# EAGLE board led_disp_print (EAGLE 7.7.0)
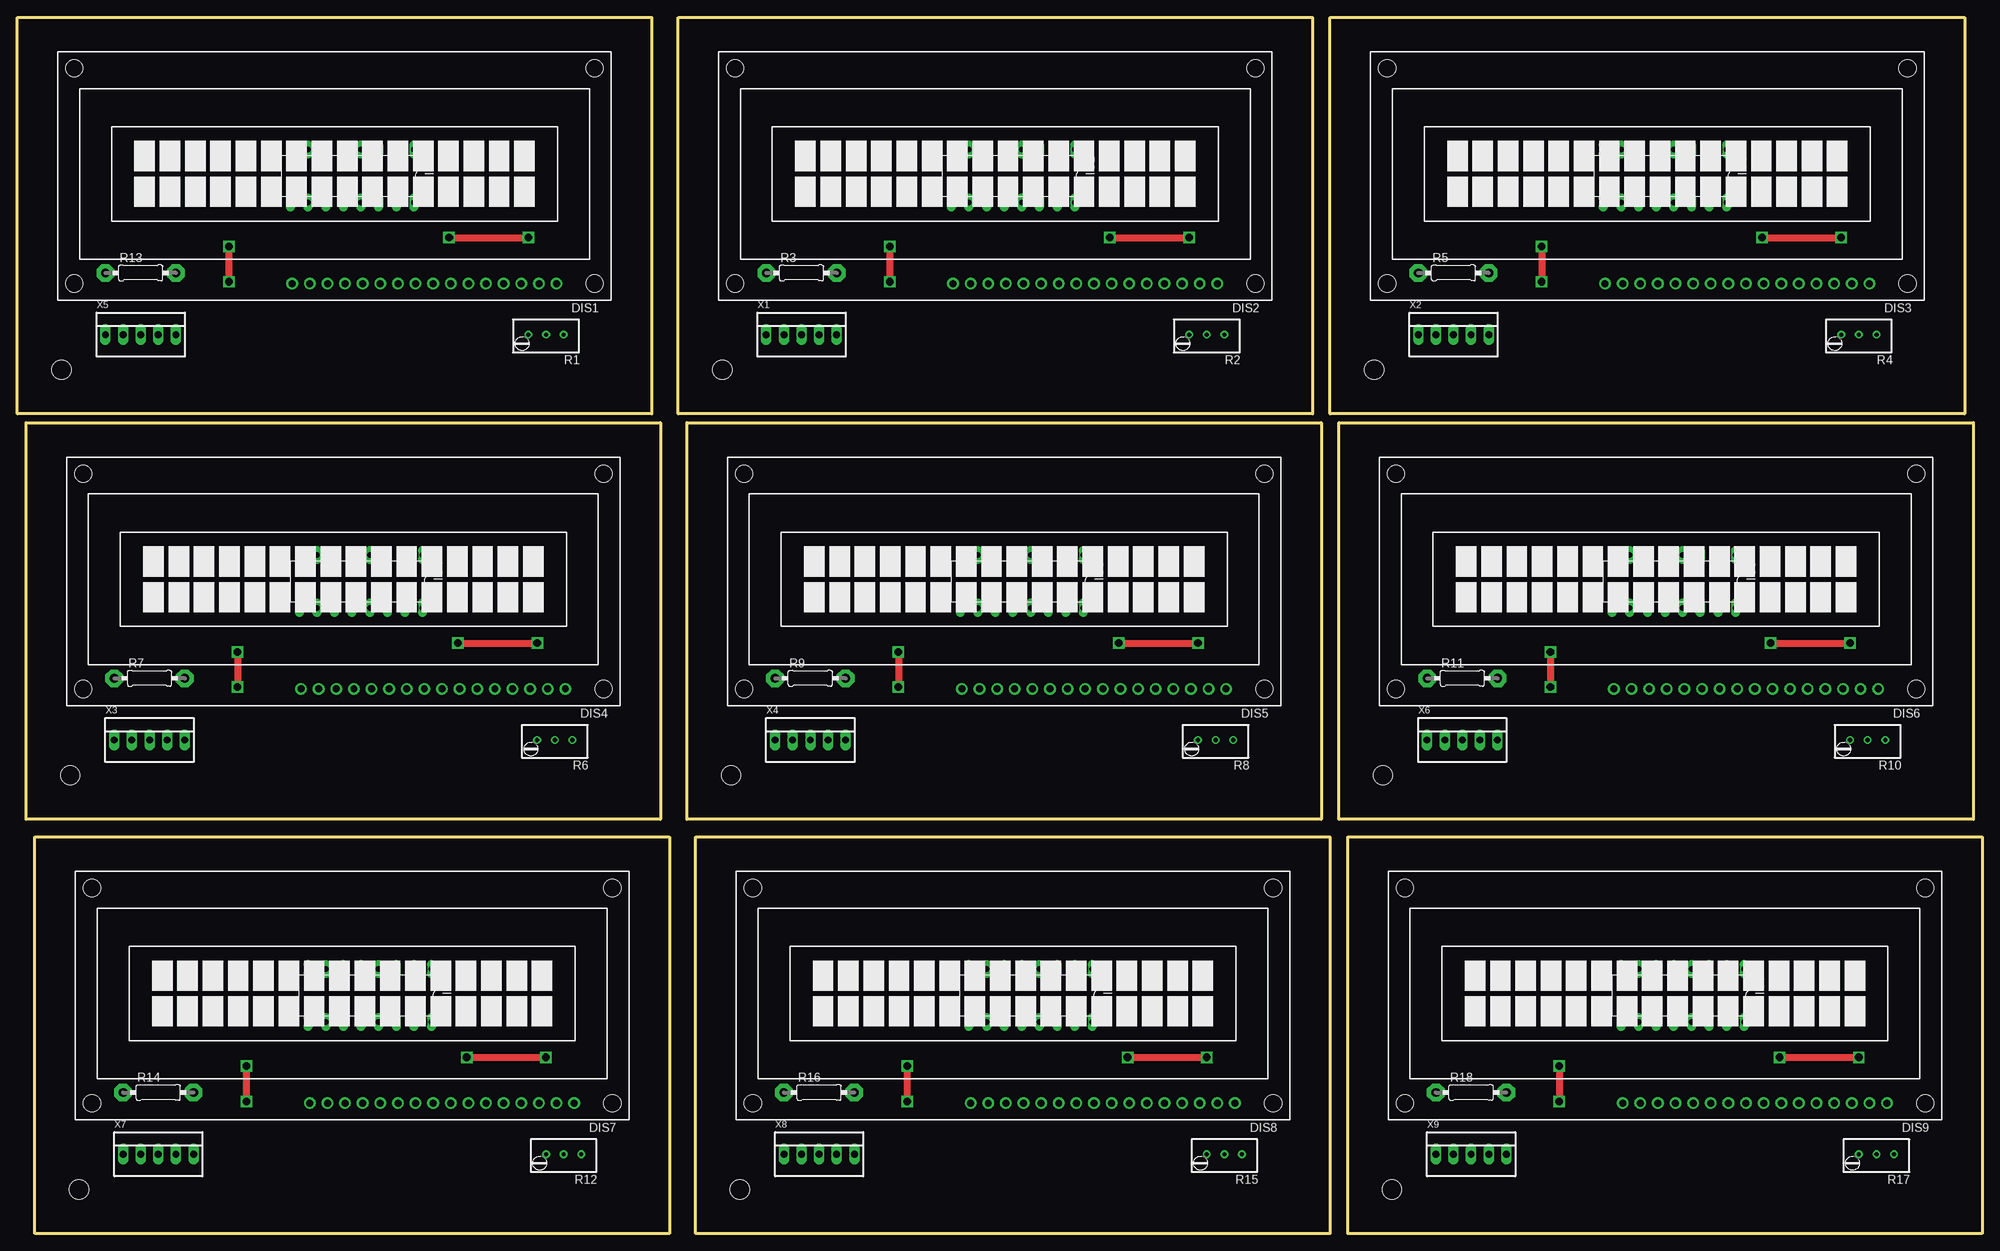
[diagram p0: board, top side]
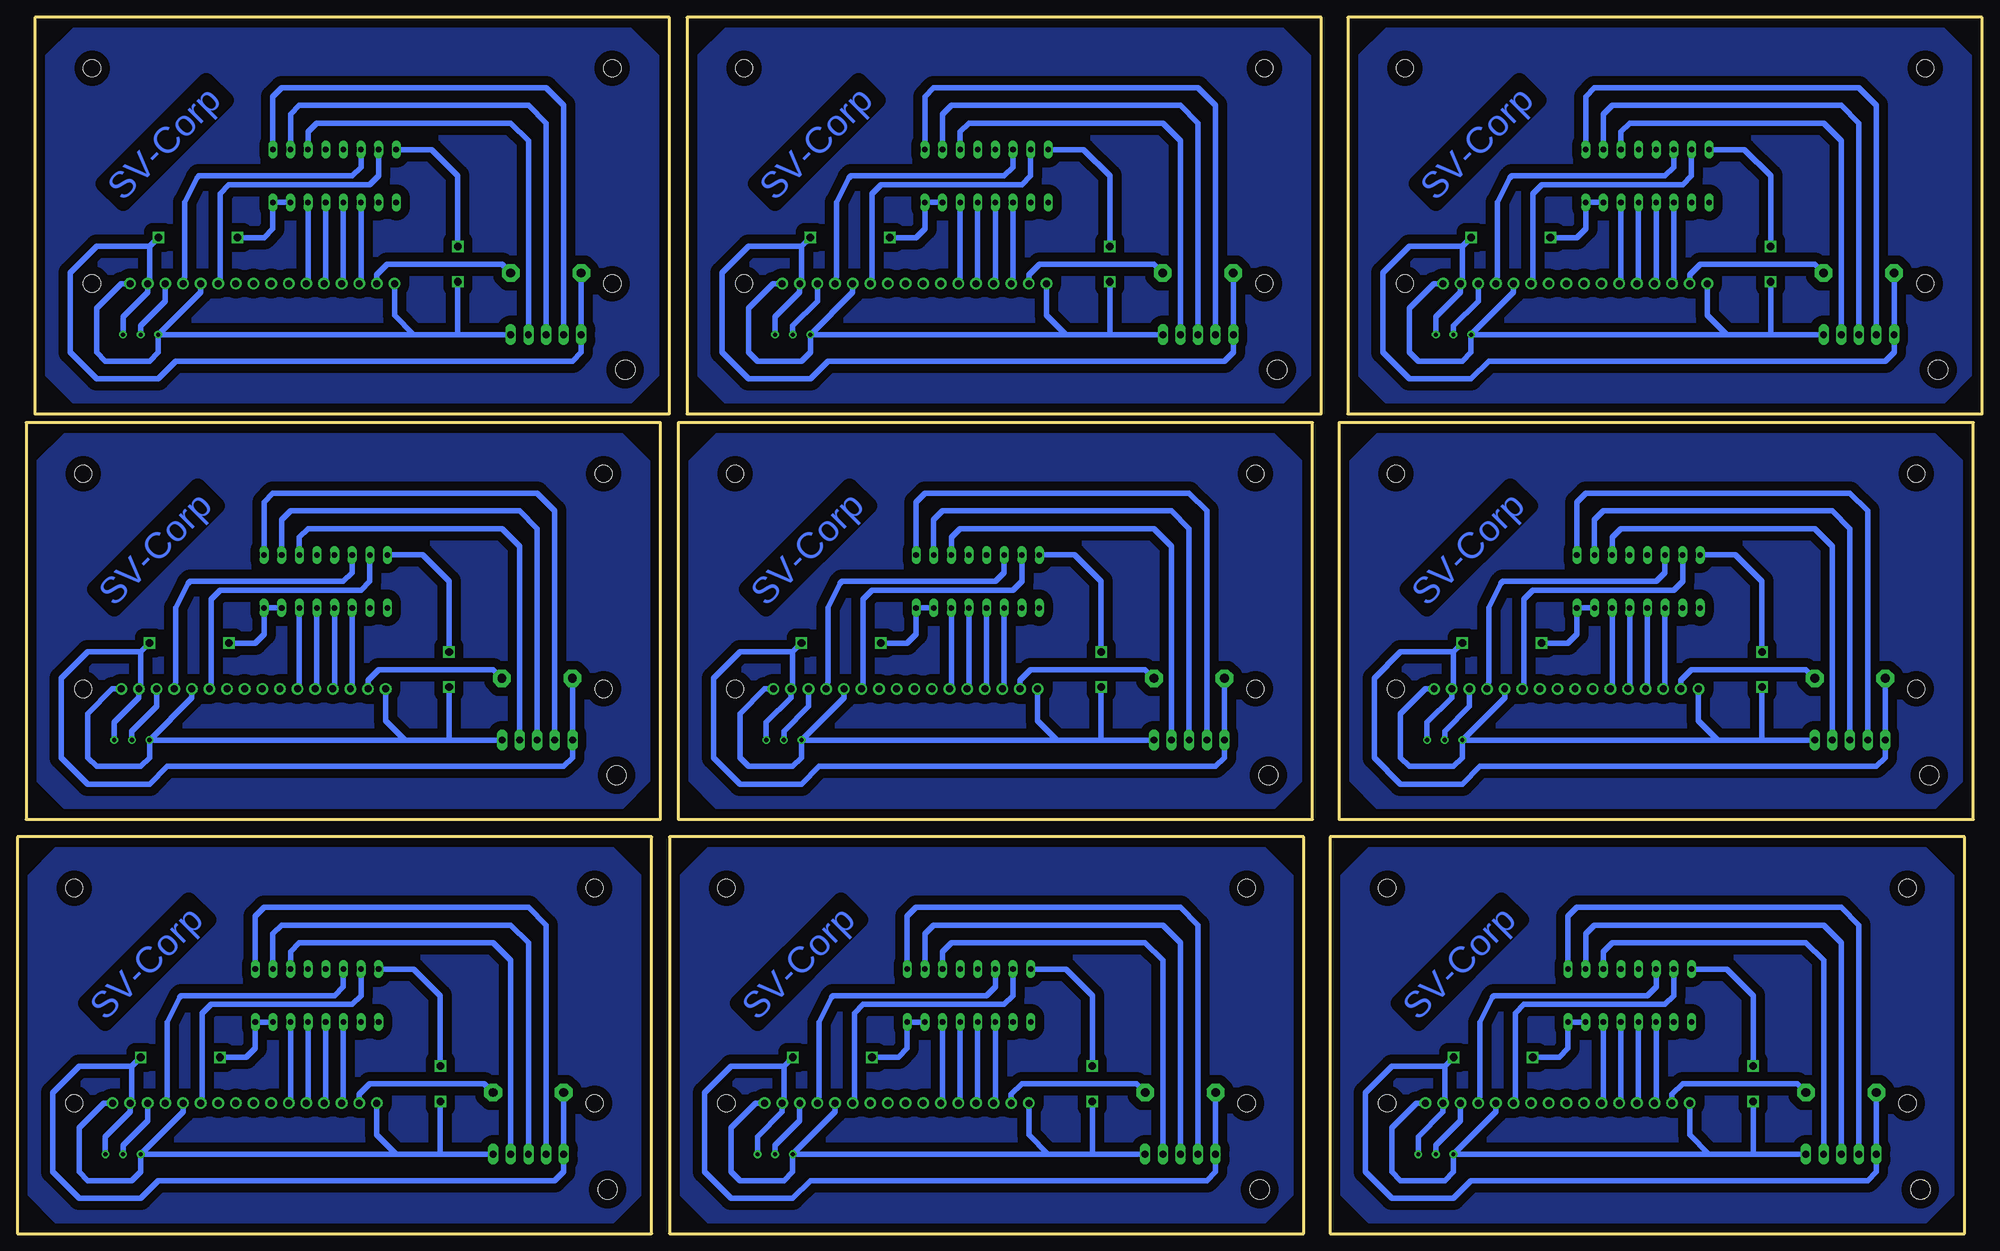
[diagram p1: board, bottom side, seen from below]

Size 283.21 x 175.26 mm. Coordinates in mm from the lower left corner, seen from the top.
Outline: 0,175.26 91.44,175.26 91.44,118.11 0,118.11 0,175.26
Outline: 95.25,175.26 186.69,175.26 186.69,118.11 95.25,118.11 95.25,175.26
Outline: 189.23,175.26 280.67,175.26 280.67,118.11 189.23,118.11 189.23,175.26
Outline: 1.27,116.84 92.71,116.84 92.71,59.69 1.27,59.69 1.27,116.84
Outline: 96.52,116.84 187.96,116.84 187.96,59.69 96.52,59.69 96.52,116.84
Outline: 190.5,116.84 281.94,116.84 281.94,59.69 190.5,59.69 190.5,116.84
Outline: 2.54,57.15 93.98,57.15 93.98,0 2.54,0 2.54,57.15
Outline: 97.79,57.15 189.23,57.15 189.23,0 97.79,0 97.79,57.15
Outline: 191.77,57.15 283.21,57.15 283.21,0 191.77,0 191.77,57.15
Copper layers (1*16): Top 0.035mm / dielectric 1.5mm / Bottom 0.035mm
Design rules "default": minimum track width 10mil, minimum drill 24mil, track to track 8mil, track to pad 8mil, pad to pad 8mil, via to via 8mil, smd to smd 8mil, copper to edge 40mil, drill to drill 8mil, minimum pad ring 10mil, minimum via ring 8mil, stop-mask expansion 4mil, vias tented up to drill 0mil, thermal gap 10mil
Holes 2.8 mm at 6.35,124.46 101.6,124.46 195.58,124.46 7.62,66.04 102.87,66.04 196.85,66.04 8.89,6.35 104.14,6.35 198.12,6.35

## Footprints (pad centres in the part's own frame; a part is rotated, then mirrored left to right if it is on the bottom)
TUXGR_16X2_R2 = drill 1 pad 1.676: 1 -32,15.5; 2 -29.46,15.5; 3 -26.92,15.5; 4 -24.38,15.5; 5 -21.84,15.5; 6 -19.3,15.5; 7 -16.76,15.5; 8 -14.22,15.5; 9 -11.68,15.5; 10 -9.14,15.5; 11 -6.6,15.5; 12 -4.06,15.5; 13 -1.52,15.5; 14 1.02,15.5; 15 3.56,15.5; 16 6.1,15.5 | hole 2.5: -37.5,-15.5; 37.5,-15.5; -37.5,15.5; 37.5,15.5
DIL16 = drill 0.813 long: 1 -8.89,-3.81; 2 -6.35,-3.81; 3 -3.81,-3.81; 4 -1.27,-3.81; 5 1.27,-3.81; 6 3.81,-3.81; 7 6.35,-3.81; 8 8.89,-3.81; 9 8.89,3.81; 10 6.35,3.81; 11 3.81,3.81; 12 1.27,3.81; 13 -1.27,3.81; 14 -3.81,3.81; 15 -6.35,3.81; 16 -8.89,3.81
RTRIMT93YA = drill 0.61: 1 0,-2.54; 2 0,0; 3 0,2.54
0207/10 = drill 1.27 pad 2.54 octagon: 1 -5.08,0; 2 5.08,0
22-23-2051 = drill 1 long: 1 -5.08,0; 2 -2.54,0; 3 0,0; 4 2.54,0; 5 5.08,0

## Placement (x,y rotation side)
DIS1  TUXGR_16X2_R2  [TUXGR_16X2_R2]  45.72,152.4 180 top
DIS2  TUXGR_16X2_R2  [TUXGR_16X2_R2]  140.97,152.4 180 top
DIS3  TUXGR_16X2_R2  [TUXGR_16X2_R2]  234.95,152.4 180 top
DIS4  TUXGR_16X2_R2  [TUXGR_16X2_R2]  46.99,93.98 180 top
DIS5  TUXGR_16X2_R2  [TUXGR_16X2_R2]  142.24,93.98 180 top
DIS6  TUXGR_16X2_R2  [TUXGR_16X2_R2]  236.22,93.98 180 top
DIS7  TUXGR_16X2_R2  [TUXGR_16X2_R2]  48.26,34.29 180 top
DIS8  TUXGR_16X2_R2  [TUXGR_16X2_R2]  143.51,34.29 180 top
DIS9  TUXGR_16X2_R2  [TUXGR_16X2_R2]  237.49,34.29 180 top
IC1  4094N  [DIL16]  48.26,152.4 180 top
IC2  4094N  [DIL16]  143.51,152.4 180 top
IC3  4094N  [DIL16]  237.49,152.4 180 top
IC4  4094N  [DIL16]  49.53,93.98 180 top
IC5  4094N  [DIL16]  144.78,93.98 180 top
IC6  4094N  [DIL16]  238.76,93.98 180 top
IC7  4094N  [DIL16]  50.8,34.29 180 top
IC8  4094N  [DIL16]  146.05,34.29 180 top
IC9  4094N  [DIL16]  240.03,34.29 180 top
R1  [RTRIMT93YA]  76.2,129.54 90 top
R2  [RTRIMT93YA]  171.45,129.54 90 top
R3  470  [0207/10]  113.03,138.43 0 top
R4  [RTRIMT93YA]  265.43,129.54 90 top
R5  470  [0207/10]  207.01,138.43 0 top
R6  [RTRIMT93YA]  77.47,71.12 90 top
R7  470  [0207/10]  19.05,80.01 0 top
R8  [RTRIMT93YA]  172.72,71.12 90 top
R9  470  [0207/10]  114.3,80.01 0 top
R10  [RTRIMT93YA]  266.7,71.12 90 top
R11  470  [0207/10]  208.28,80.01 0 top
R12  [RTRIMT93YA]  78.74,11.43 90 top
R13  470  [0207/10]  17.78,138.43 0 top
R14  470  [0207/10]  20.32,20.32 0 top
R15  [RTRIMT93YA]  173.99,11.43 90 top
R16  470  [0207/10]  115.57,20.32 0 top
R17  [RTRIMT93YA]  267.97,11.43 90 top
R18  470  [0207/10]  209.55,20.32 0 top
X1  22-23-2051  [22-23-2051]  113.03,129.54 0 top
X2  22-23-2051  [22-23-2051]  207.01,129.54 0 top
X3  22-23-2051  [22-23-2051]  19.05,71.12 0 top
X4  22-23-2051  [22-23-2051]  114.3,71.12 0 top
X5  22-23-2051  [22-23-2051]  17.78,129.54 0 top
X6  22-23-2051  [22-23-2051]  208.28,71.12 0 top
X7  22-23-2051  [22-23-2051]  20.32,11.43 0 top
X8  22-23-2051  [22-23-2051]  115.57,11.43 0 top
X9  22-23-2051  [22-23-2051]  209.55,11.43 0 top

## Library data of the parts
DIS1-DIS9 = display-lcd; OC_FARNELL: unknown; OC_NEWARK: unknown
IC1-IC9 = 40xx
R1 R2 R4 R6 R8 R10 R12 R15 R17 = rcl
R3 R5 R7 R9 R11 R13 R14 R16 R18 = resistor
X1-X9 = con-molex; MF: MOLEX; MPN: 22-23-2051; OC_FARNELL: 1462952; OC_NEWARK: 38C9178

## Nets
E: DIS1.6 IC1.7
E1: DIS2.6 IC2.7
E2: DIS3.6 IC3.7
E3: DIS4.6 IC4.7
E4: DIS5.6 IC5.7
E5: DIS6.6 IC6.7
E6: DIS7.6 IC7.7
E7: DIS8.6 IC8.7
E8: DIS9.6 IC9.7
N$1: DIS1.3 R1.2
N$2: DIS1.11 IC1.14
N$3: DIS1.12 IC1.13
N$4: DIS1.13 IC1.12
N$5: DIS1.14 IC1.11
N$6: DIS2.3 R2.2
N$7: DIS2.11 IC2.14
N$8: DIS2.12 IC2.13
N$9: DIS2.13 IC2.12
N$10: DIS2.14 IC2.11
N$11: IC2.3 X1.4
N$12: IC2.2 X1.3
N$13: IC2.1 X1.2
N$16: DIS2.15 R3.2
N$17: DIS3.3 R4.2
N$18: DIS3.11 IC3.14
N$19: DIS3.12 IC3.13
N$20: DIS3.13 IC3.12
N$21: DIS3.14 IC3.11
N$22: IC3.3 X2.4
N$23: IC3.2 X2.3
N$24: IC3.1 X2.2
N$26: DIS3.15 R5.2
N$27: DIS4.3 R6.2
N$28: DIS4.11 IC4.14
N$29: DIS4.12 IC4.13
N$30: DIS4.13 IC4.12
N$31: IC1.3 X5.4
N$32: IC1.2 X5.3
N$33: IC1.1 X5.2
N$34: DIS4.14 IC4.11
N$35: DIS1.15 R13.2
N$36: IC4.3 X3.4
N$37: IC4.2 X3.3
N$38: IC4.1 X3.2
N$40: DIS4.15 R7.2
N$41: DIS5.3 R8.2
N$42: DIS5.11 IC5.14
N$43: DIS5.12 IC5.13
N$44: DIS5.13 IC5.12
N$45: DIS5.14 IC5.11
N$46: IC5.3 X4.4
N$47: IC5.2 X4.3
N$48: IC5.1 X4.2
N$50: DIS5.15 R9.2
N$51: DIS6.3 R10.2
N$52: DIS6.11 IC6.14
N$53: DIS6.12 IC6.13
N$54: DIS6.13 IC6.12
N$55: DIS6.14 IC6.11
N$56: IC6.3 X6.4
N$57: IC6.2 X6.3
N$58: IC6.1 X6.2
N$60: DIS6.15 R11.2
N$61: DIS7.3 R12.2
N$62: DIS7.11 IC7.14
N$63: DIS7.12 IC7.13
N$64: DIS7.13 IC7.12
N$65: DIS7.14 IC7.11
N$66: IC7.3 X7.4
N$67: IC7.2 X7.3
N$68: IC7.1 X7.2
N$70: DIS7.15 R14.2
N$71: DIS8.3 R15.2
N$72: DIS8.11 IC8.14
N$73: DIS8.12 IC8.13
N$74: DIS8.13 IC8.12
N$75: DIS8.14 IC8.11
N$76: IC8.3 X8.4
N$77: IC8.2 X8.3
N$78: IC8.1 X8.2
N$80: DIS8.15 R16.2
N$81: DIS9.3 R17.2
N$82: DIS9.11 IC9.14
N$83: DIS9.12 IC9.13
N$84: DIS9.13 IC9.12
N$85: DIS9.14 IC9.11
N$86: IC9.3 X9.4
N$87: IC9.2 X9.3
N$88: IC9.1 X9.2
N$90: DIS9.15 R18.2
RS: DIS1.4 IC1.6
RS1: DIS2.4 IC2.6
RS2: DIS3.4 IC3.6
RS3: DIS4.4 IC4.6
RS4: DIS5.4 IC5.6
RS5: DIS6.4 IC6.6
RS6: DIS7.4 IC7.6
RS7: DIS8.4 IC8.6
RS8: DIS9.4 IC9.6
VDD: DIS1.2 IC1.15 IC1.16 R1.1 R13.1 X5.1
VDD1: DIS2.2 IC2.15 IC2.16 R2.1 R3.1 X1.1
VDD2: DIS3.2 IC3.15 IC3.16 R4.1 R5.1 X2.1
VDD3: DIS4.2 IC4.15 IC4.16 R6.1 R7.1 X3.1
VDD4: DIS5.2 IC5.15 IC5.16 R8.1 R9.1 X4.1
VDD5: DIS6.2 IC6.15 IC6.16 R10.1 R11.1 X6.1
VDD6: DIS7.2 IC7.15 IC7.16 R12.1 R14.1 X7.1
VDD7: DIS8.2 IC8.15 IC8.16 R15.1 R16.1 X8.1
VDD8: DIS9.2 IC9.15 IC9.16 R17.1 R18.1 X9.1
VSS: DIS1.1 DIS1.5 DIS1.16 IC1.8 R1.3 X5.5
VSS1: DIS2.1 DIS2.5 DIS2.16 IC2.8 R2.3 X1.5
VSS2: DIS3.1 DIS3.5 DIS3.16 IC3.8 R4.3 X2.5
VSS3: DIS4.1 DIS4.5 DIS4.16 IC4.8 R6.3 X3.5
VSS4: DIS5.1 DIS5.5 DIS5.16 IC5.8 R8.3 X4.5
VSS5: DIS6.1 DIS6.5 DIS6.16 IC6.8 R10.3 X6.5
VSS6: DIS7.1 DIS7.5 DIS7.16 IC7.8 R12.3 X7.5
VSS7: DIS8.1 DIS8.5 DIS8.16 IC8.8 R15.3 X8.5
VSS8: DIS9.1 DIS9.5 DIS9.16 IC9.8 R17.3 X9.5

## Tracks (layer width: path | path; a pad name or v marks a point on that pad's centre or on a via)
E
  Bottom 0.813: IC1.7 41.91,152.4 43.18,151.13 63.5,151.13 64.77,149.86 64.77,137.15 DIS1.6
E1
  Bottom 0.813: IC2.7 137.16,152.4 138.43,151.13 158.75,151.13 160.02,149.86 160.02,137.15 DIS2.6
E2
  Bottom 0.813: IC3.7 231.14,152.4 232.41,151.13 252.73,151.13 254,149.86 254,137.15 DIS3.6
E3
  Bottom 0.813: IC4.7 43.18,93.98 44.45,92.71 64.77,92.71 66.04,91.44 66.04,78.73 DIS4.6
E4
  Bottom 0.813: IC5.7 138.43,93.98 139.7,92.71 160.02,92.71 161.29,91.44 161.29,78.73 DIS5.6
E5
  Bottom 0.813: IC6.7 232.41,93.98 233.68,92.71 254,92.71 255.27,91.44 255.27,78.73 DIS6.6
E6
  Bottom 0.813: IC7.7 44.45,34.29 45.72,33.02 66.04,33.02 67.31,31.75 67.31,19.04 DIS7.6
E7
  Bottom 0.813: IC8.7 139.7,34.29 140.97,33.02 161.29,33.02 162.56,31.75 162.56,19.04 DIS8.6
E8
  Bottom 0.813: IC9.7 233.68,34.29 234.95,33.02 255.27,33.02 256.54,31.75 256.54,19.04 DIS9.6
N$1
  Bottom 0.813: DIS1.3 72.64,134.37 76.2,130.81 R1.2
N$2
  Bottom 0.813: IC1.14 52.07,137.15 DIS1.11
N$3
  Bottom 0.813: IC1.13 49.53,137.15 DIS1.12
N$4
  Bottom 0.813: IC1.12 46.99,137.15 DIS1.13
N$5
  Bottom 0.813: IC1.11 44.45,137.15 DIS1.14
N$6
  Bottom 0.813: DIS2.3 167.89,134.37 171.45,130.81 R2.2
N$7
  Bottom 0.813: IC2.14 147.32,137.15 DIS2.11
N$8
  Bottom 0.813: IC2.13 144.78,137.15 DIS2.12
N$9
  Bottom 0.813: IC2.12 142.24,137.15 DIS2.13
N$10
  Bottom 0.813: IC2.11 139.7,137.15 DIS2.14
N$11
  Bottom 0.813: IC2.3 147.32,158.75 146.05,160.02 118.11,160.02 115.57,157.48 X1.4
N$12
  Bottom 0.813: IC2.2 149.86,161.29 148.59,162.56 115.57,162.56 113.03,160.02 X1.3
N$13
  Bottom 0.813: IC2.1 152.4,163.83 151.13,165.1 113.03,165.1 110.49,162.56 X1.2
N$14
  pour Bottom (isolate 1.27): 6.35,173.99 85.09,173.99 90.17,168.91 90.17,124.46 85.09,119.38 6.35,119.38 1.27,124.46 1.27,168.91
N$15
  pour Bottom (isolate 1.27): 101.6,173.99 180.34,173.99 185.42,168.91 185.42,124.46 180.34,119.38 101.6,119.38 96.52,124.46 96.52,168.91
N$16
  Bottom 0.813: DIS2.15 137.41,138.18 135.89,139.7 119.38,139.7 R3.2
N$17
  Bottom 0.813: DIS3.3 261.87,134.37 265.43,130.81 R4.2
N$18
  Bottom 0.813: IC3.14 241.3,137.15 DIS3.11
N$19
  Bottom 0.813: IC3.13 238.76,137.15 DIS3.12
N$20
  Bottom 0.813: IC3.12 236.22,137.15 DIS3.13
N$21
  Bottom 0.813: IC3.11 233.68,137.15 DIS3.14
N$22
  Bottom 0.813: IC3.3 241.3,158.75 240.03,160.02 212.09,160.02 209.55,157.48 X2.4
N$23
  Bottom 0.813: IC3.2 243.84,161.29 242.57,162.56 209.55,162.56 207.01,160.02 X2.3
N$24
  Bottom 0.813: IC3.1 246.38,163.83 245.11,165.1 207.01,165.1 204.47,162.56 X2.2
N$25
  pour Bottom (isolate 1.27): 195.58,173.99 274.32,173.99 279.4,168.91 279.4,124.46 274.32,119.38 195.58,119.38 190.5,124.46 190.5,168.91
N$26
  Bottom 0.813: DIS3.15 231.39,138.18 229.87,139.7 213.36,139.7 R5.2
N$27
  Bottom 0.813: DIS4.3 73.91,75.95 77.47,72.39 R6.2
N$28
  Bottom 0.813: IC4.14 53.34,78.73 DIS4.11
N$29
  Bottom 0.813: IC4.13 50.8,78.73 DIS4.12
N$30
  Bottom 0.813: IC4.12 48.26,78.73 DIS4.13
N$31
  Bottom 0.813: IC1.3 52.07,158.75 50.8,160.02 22.86,160.02 20.32,157.48 X5.4
N$32
  Bottom 0.813: IC1.2 54.61,161.29 53.34,162.56 20.32,162.56 17.78,160.02 X5.3
N$33
  Bottom 0.813: IC1.1 57.15,163.83 55.88,165.1 17.78,165.1 15.24,162.56 X5.2
N$34
  Bottom 0.813: IC4.11 45.72,78.73 DIS4.14
N$35
  Bottom 0.813: DIS1.15 42.16,138.18 40.64,139.7 24.13,139.7 R13.2
N$36
  Bottom 0.813: IC4.3 53.34,100.33 52.07,101.6 24.13,101.6 21.59,99.06 X3.4
N$37
  Bottom 0.813: IC4.2 55.88,102.87 54.61,104.14 21.59,104.14 19.05,101.6 X3.3
N$38
  Bottom 0.813: IC4.1 58.42,105.41 57.15,106.68 19.05,106.68 16.51,104.14 X3.2
N$39
  pour Bottom (isolate 1.27): 7.62,115.57 86.36,115.57 91.44,110.49 91.44,66.04 86.36,60.96 7.62,60.96 2.54,66.04 2.54,110.49
N$40
  Bottom 0.813: DIS4.15 43.43,79.76 41.91,81.28 25.4,81.28 R7.2
N$41
  Bottom 0.813: DIS5.3 169.16,75.95 172.72,72.39 R8.2
N$42
  Bottom 0.813: IC5.14 148.59,78.73 DIS5.11
N$43
  Bottom 0.813: IC5.13 146.05,78.73 DIS5.12
N$44
  Bottom 0.813: IC5.12 143.51,78.73 DIS5.13
N$45
  Bottom 0.813: IC5.11 140.97,78.73 DIS5.14
N$46
  Bottom 0.813: IC5.3 148.59,100.33 147.32,101.6 119.38,101.6 116.84,99.06 X4.4
N$47
  Bottom 0.813: IC5.2 151.13,102.87 149.86,104.14 116.84,104.14 114.3,101.6 X4.3
N$48
  Bottom 0.813: IC5.1 153.67,105.41 152.4,106.68 114.3,106.68 111.76,104.14 X4.2
N$49
  pour Bottom (isolate 1.27): 102.87,115.57 181.61,115.57 186.69,110.49 186.69,66.04 181.61,60.96 102.87,60.96 97.79,66.04 97.79,110.49
N$50
  Bottom 0.813: DIS5.15 138.68,79.76 137.16,81.28 120.65,81.28 R9.2
N$51
  Bottom 0.813: DIS6.3 263.14,75.95 266.7,72.39 R10.2
N$52
  Bottom 0.813: IC6.14 242.57,78.73 DIS6.11
N$53
  Bottom 0.813: IC6.13 240.03,78.73 DIS6.12
N$54
  Bottom 0.813: IC6.12 237.49,78.73 DIS6.13
N$55
  Bottom 0.813: IC6.11 234.95,78.73 DIS6.14
N$56
  Bottom 0.813: IC6.3 242.57,100.33 241.3,101.6 213.36,101.6 210.82,99.06 X6.4
N$57
  Bottom 0.813: IC6.2 245.11,102.87 243.84,104.14 210.82,104.14 208.28,101.6 X6.3
N$58
  Bottom 0.813: IC6.1 247.65,105.41 246.38,106.68 208.28,106.68 205.74,104.14 X6.2
N$59
  pour Bottom (isolate 1.27): 196.85,115.57 275.59,115.57 280.67,110.49 280.67,66.04 275.59,60.96 196.85,60.96 191.77,66.04 191.77,110.49
N$60
  Bottom 0.813: DIS6.15 232.66,79.76 231.14,81.28 214.63,81.28 R11.2
N$61
  Bottom 0.813: DIS7.3 75.18,16.26 78.74,12.7 R12.2
N$62
  Bottom 0.813: IC7.14 54.61,19.04 DIS7.11
N$63
  Bottom 0.813: IC7.13 52.07,19.04 DIS7.12
N$64
  Bottom 0.813: IC7.12 49.53,19.04 DIS7.13
N$65
  Bottom 0.813: IC7.11 46.99,19.04 DIS7.14
N$66
  Bottom 0.813: IC7.3 54.61,40.64 53.34,41.91 25.4,41.91 22.86,39.37 X7.4
N$67
  Bottom 0.813: IC7.2 57.15,43.18 55.88,44.45 22.86,44.45 20.32,41.91 X7.3
N$68
  Bottom 0.813: IC7.1 59.69,45.72 58.42,46.99 20.32,46.99 17.78,44.45 X7.2
N$69
  pour Bottom (isolate 1.27): 8.89,55.88 87.63,55.88 92.71,50.8 92.71,6.35 87.63,1.27 8.89,1.27 3.81,6.35 3.81,50.8
N$70
  Bottom 0.813: DIS7.15 44.7,20.07 43.18,21.59 26.67,21.59 R14.2
N$71
  Bottom 0.813: DIS8.3 170.43,16.26 173.99,12.7 R15.2
N$72
  Bottom 0.813: IC8.14 149.86,19.04 DIS8.11
N$73
  Bottom 0.813: IC8.13 147.32,19.04 DIS8.12
N$74
  Bottom 0.813: IC8.12 144.78,19.04 DIS8.13
N$75
  Bottom 0.813: IC8.11 142.24,19.04 DIS8.14
N$76
  Bottom 0.813: IC8.3 149.86,40.64 148.59,41.91 120.65,41.91 118.11,39.37 X8.4
N$77
  Bottom 0.813: IC8.2 152.4,43.18 151.13,44.45 118.11,44.45 115.57,41.91 X8.3
N$78
  Bottom 0.813: IC8.1 154.94,45.72 153.67,46.99 115.57,46.99 113.03,44.45 X8.2
N$79
  pour Bottom (isolate 1.27): 104.14,55.88 182.88,55.88 187.96,50.8 187.96,6.35 182.88,1.27 104.14,1.27 99.06,6.35 99.06,50.8
N$80
  Bottom 0.813: DIS8.15 139.95,20.07 138.43,21.59 121.92,21.59 R16.2
N$81
  Bottom 0.813: DIS9.3 264.41,16.26 267.97,12.7 R17.2
N$82
  Bottom 0.813: IC9.14 243.84,19.04 DIS9.11
N$83
  Bottom 0.813: IC9.13 241.3,19.04 DIS9.12
N$84
  Bottom 0.813: IC9.12 238.76,19.04 DIS9.13
N$85
  Bottom 0.813: IC9.11 236.22,19.04 DIS9.14
N$86
  Bottom 0.813: IC9.3 243.84,40.64 242.57,41.91 214.63,41.91 212.09,39.37 X9.4
N$87
  Bottom 0.813: IC9.2 246.38,43.18 245.11,44.45 212.09,44.45 209.55,41.91 X9.3
N$88
  Bottom 0.813: IC9.1 248.92,45.72 247.65,46.99 209.55,46.99 207.01,44.45 X9.2
N$89
  pour Bottom (isolate 1.27): 198.12,55.88 276.86,55.88 281.94,50.8 281.94,6.35 276.86,1.27 198.12,1.27 193.04,6.35 193.04,50.8
N$90
  Bottom 0.813: DIS9.15 233.93,20.07 232.41,21.59 215.9,21.59 R18.2
RS
  Bottom 0.813: IC1.6 44.45,153.67 45.72,152.4 67.82,152.4 68.07,152.15 69.85,148.59 69.85,137.92 DIS1.4
RS1
  Bottom 0.813: IC2.6 139.7,153.67 140.97,152.4 163.07,152.4 163.32,152.15 165.1,148.59 165.1,137.92 DIS2.4
RS2
  Bottom 0.813: IC3.6 233.68,153.67 234.95,152.4 257.05,152.4 257.3,152.15 259.08,148.59 259.08,137.92 DIS3.4
RS3
  Bottom 0.813: IC4.6 45.72,95.25 46.99,93.98 69.09,93.98 69.34,93.73 71.12,90.17 71.12,79.5 DIS4.4
RS4
  Bottom 0.813: IC5.6 140.97,95.25 142.24,93.98 164.34,93.98 164.59,93.73 166.37,90.17 166.37,79.5 DIS5.4
RS5
  Bottom 0.813: IC6.6 234.95,95.25 236.22,93.98 258.32,93.98 258.57,93.73 260.35,90.17 260.35,79.5 DIS6.4
RS6
  Bottom 0.813: IC7.6 46.99,35.56 48.26,34.29 70.36,34.29 70.61,34.04 72.39,30.48 72.39,19.81 DIS7.4
RS7
  Bottom 0.813: IC8.6 142.24,35.56 143.51,34.29 165.61,34.29 165.86,34.04 167.64,30.48 167.64,19.81 DIS8.4
RS8
  Bottom 0.813: IC9.6 236.22,35.56 237.49,34.29 259.59,34.29 259.84,34.04 261.62,30.48 261.62,19.81 DIS9.4
VDD  (via drill 1.1)
  Top 1.016: v62.23,143.51 v73.66,143.51
  Bottom 0.813: IC1.15 IC1.16 57.15,144.78 58.42,143.51 v62.23,143.51 | R1.1 78.74,132.08 75.18,135.64 DIS1.2 74.93,137.15 74.93,142.24 | 74.93,142.24 v73.66,143.51 | 74.93,142.24 82.55,142.24 86.36,138.43 86.36,127 82.55,123.19 73.66,123.19 71.12,125.73 13.97,125.73 12.7,127 X5.1 R13.1
VDD1  (via drill 1.1)
  Top 1.016: v157.48,143.51 v168.91,143.51
  Bottom 0.813: IC2.15 IC2.16 152.4,144.78 153.67,143.51 v157.48,143.51 | R2.1 173.99,132.08 170.43,135.64 DIS2.2 170.18,137.15 170.18,142.24 | 170.18,142.24 v168.91,143.51 | 170.18,142.24 177.8,142.24 181.61,138.43 181.61,127 177.8,123.19 168.91,123.19 166.37,125.73 109.22,125.73 107.95,127 X1.1 R3.1
VDD2  (via drill 1.1)
  Top 1.016: v251.46,143.51 v262.89,143.51
  Bottom 0.813: IC3.15 IC3.16 246.38,144.78 247.65,143.51 v251.46,143.51 | R4.1 267.97,132.08 264.41,135.64 DIS3.2 264.16,137.15 264.16,142.24 | 264.16,142.24 v262.89,143.51 | 264.16,142.24 271.78,142.24 275.59,138.43 275.59,127 271.78,123.19 262.89,123.19 260.35,125.73 203.2,125.73 201.93,127 X2.1 R5.1
VDD3  (via drill 1.1)
  Top 1.016: v63.5,85.09 v74.93,85.09
  Bottom 0.813: IC4.15 IC4.16 58.42,86.36 59.69,85.09 v63.5,85.09 | R6.1 80.01,73.66 76.45,77.22 DIS4.2 76.2,78.73 76.2,83.82 | 76.2,83.82 v74.93,85.09 | 76.2,83.82 83.82,83.82 87.63,80.01 87.63,68.58 83.82,64.77 74.93,64.77 72.39,67.31 15.24,67.31 13.97,68.58 X3.1 R7.1
VDD4  (via drill 1.1)
  Top 1.016: v158.75,85.09 v170.18,85.09
  Bottom 0.813: IC5.15 IC5.16 153.67,86.36 154.94,85.09 v158.75,85.09 | R8.1 175.26,73.66 171.7,77.22 DIS5.2 171.45,78.73 171.45,83.82 | 171.45,83.82 v170.18,85.09 | 171.45,83.82 179.07,83.82 182.88,80.01 182.88,68.58 179.07,64.77 170.18,64.77 167.64,67.31 110.49,67.31 109.22,68.58 X4.1 R9.1
VDD5  (via drill 1.1)
  Top 1.016: v252.73,85.09 v264.16,85.09
  Bottom 0.813: IC6.15 IC6.16 247.65,86.36 248.92,85.09 v252.73,85.09 | R10.1 269.24,73.66 265.68,77.22 DIS6.2 265.43,78.73 265.43,83.82 | 265.43,83.82 v264.16,85.09 | 265.43,83.82 273.05,83.82 276.86,80.01 276.86,68.58 273.05,64.77 264.16,64.77 261.62,67.31 204.47,67.31 203.2,68.58 X6.1 R11.1
VDD6  (via drill 1.1)
  Top 1.016: v64.77,25.4 v76.2,25.4
  Bottom 0.813: IC7.15 IC7.16 59.69,26.67 60.96,25.4 v64.77,25.4 | R12.1 81.28,13.97 77.72,17.53 DIS7.2 77.47,19.04 77.47,24.13 | 77.47,24.13 v76.2,25.4 | 77.47,24.13 85.09,24.13 88.9,20.32 88.9,8.89 85.09,5.08 76.2,5.08 73.66,7.62 16.51,7.62 15.24,8.89 X7.1 R14.1
VDD7  (via drill 1.1)
  Top 1.016: v160.02,25.4 v171.45,25.4
  Bottom 0.813: IC8.15 IC8.16 154.94,26.67 156.21,25.4 v160.02,25.4 | R15.1 176.53,13.97 172.97,17.53 DIS8.2 172.72,19.04 172.72,24.13 | 172.72,24.13 v171.45,25.4 | 172.72,24.13 180.34,24.13 184.15,20.32 184.15,8.89 180.34,5.08 171.45,5.08 168.91,7.62 111.76,7.62 110.49,8.89 X8.1 R16.1
VDD8  (via drill 1.1)
  Top 1.016: v254,25.4 v265.43,25.4
  Bottom 0.813: IC9.15 IC9.16 248.92,26.67 250.19,25.4 v254,25.4 | R17.1 270.51,13.97 266.95,17.53 DIS9.2 266.7,19.04 266.7,24.13 | 266.7,24.13 v265.43,25.4 | 266.7,24.13 274.32,24.13 278.13,20.32 278.13,8.89 274.32,5.08 265.43,5.08 262.89,7.62 205.74,7.62 204.47,8.89 X9.1 R18.1
VSS  (via drill 1.1)
  Top 1.016: v30.48,142.24 v30.48,137.16
  Bottom 0.813: IC1.8 34.29,156.21 30.48,152.4 v30.48,142.24 | DIS1.1 79,136.9 82.55,133.35 82.55,127 81.28,125.73 74.93,125.73 73.66,127 R1.3 | DIS1.5 67.56,135.64 R1.3 | X5.5 30.48,129.54 | 30.48,129.54 36.83,129.54 | 36.83,129.54 R1.3 | DIS1.16 39.62,132.33 36.83,129.54 | 30.48,129.54 v30.48,137.16
VSS1  (via drill 1.1)
  Top 1.016: v125.73,142.24 v125.73,137.16
  Bottom 0.813: IC2.8 129.54,156.21 125.73,152.4 v125.73,142.24 | DIS2.1 174.25,136.9 177.8,133.35 177.8,127 176.53,125.73 170.18,125.73 168.91,127 R2.3 | DIS2.5 162.81,135.64 R2.3 | X1.5 125.73,129.54 | 125.73,129.54 132.08,129.54 | 132.08,129.54 R2.3 | DIS2.16 134.87,132.33 132.08,129.54 | 125.73,129.54 v125.73,137.16
VSS2  (via drill 1.1)
  Top 1.016: v219.71,142.24 v219.71,137.16
  Bottom 0.813: IC3.8 223.52,156.21 219.71,152.4 v219.71,142.24 | DIS3.1 268.23,136.9 271.78,133.35 271.78,127 270.51,125.73 264.16,125.73 262.89,127 R4.3 | DIS3.5 256.79,135.64 R4.3 | X2.5 219.71,129.54 | 219.71,129.54 226.06,129.54 | 226.06,129.54 R4.3 | DIS3.16 228.85,132.33 226.06,129.54 | 219.71,129.54 v219.71,137.16
VSS3  (via drill 1.1)
  Top 1.016: v31.75,83.82 v31.75,78.74
  Bottom 0.813: IC4.8 35.56,97.79 31.75,93.98 v31.75,83.82 | DIS4.1 80.27,78.48 83.82,74.93 83.82,68.58 82.55,67.31 76.2,67.31 74.93,68.58 R6.3 | DIS4.5 68.83,77.22 R6.3 | X3.5 31.75,71.12 | 31.75,71.12 38.1,71.12 | 38.1,71.12 R6.3 | DIS4.16 40.89,73.91 38.1,71.12 | 31.75,71.12 v31.75,78.74
VSS4  (via drill 1.1)
  Top 1.016: v127,83.82 v127,78.74
  Bottom 0.813: IC5.8 130.81,97.79 127,93.98 v127,83.82 | DIS5.1 175.52,78.48 179.07,74.93 179.07,68.58 177.8,67.31 171.45,67.31 170.18,68.58 R8.3 | DIS5.5 164.08,77.22 R8.3 | X4.5 127,71.12 | 127,71.12 133.35,71.12 | 133.35,71.12 R8.3 | DIS5.16 136.14,73.91 133.35,71.12 | 127,71.12 v127,78.74
VSS5  (via drill 1.1)
  Top 1.016: v220.98,83.82 v220.98,78.74
  Bottom 0.813: IC6.8 224.79,97.79 220.98,93.98 v220.98,83.82 | DIS6.1 269.5,78.48 273.05,74.93 273.05,68.58 271.78,67.31 265.43,67.31 264.16,68.58 R10.3 | DIS6.5 258.06,77.22 R10.3 | X6.5 220.98,71.12 | 220.98,71.12 227.33,71.12 | 227.33,71.12 R10.3 | DIS6.16 230.12,73.91 227.33,71.12 | 220.98,71.12 v220.98,78.74
VSS6  (via drill 1.1)
  Top 1.016: v33.02,24.13 v33.02,19.05
  Bottom 0.813: IC7.8 36.83,38.1 33.02,34.29 v33.02,24.13 | DIS7.1 81.54,18.79 85.09,15.24 85.09,8.89 83.82,7.62 77.47,7.62 76.2,8.89 R12.3 | DIS7.5 70.1,17.53 R12.3 | X7.5 33.02,11.43 | 33.02,11.43 39.37,11.43 | 39.37,11.43 R12.3 | DIS7.16 42.16,14.22 39.37,11.43 | 33.02,11.43 v33.02,19.05
VSS7  (via drill 1.1)
  Top 1.016: v128.27,24.13 v128.27,19.05
  Bottom 0.813: IC8.8 132.08,38.1 128.27,34.29 v128.27,24.13 | DIS8.1 176.79,18.79 180.34,15.24 180.34,8.89 179.07,7.62 172.72,7.62 171.45,8.89 R15.3 | DIS8.5 165.35,17.53 R15.3 | X8.5 128.27,11.43 | 128.27,11.43 134.62,11.43 | 134.62,11.43 R15.3 | DIS8.16 137.41,14.22 134.62,11.43 | 128.27,11.43 v128.27,19.05
VSS8  (via drill 1.1)
  Top 1.016: v222.25,24.13 v222.25,19.05
  Bottom 0.813: IC9.8 226.06,38.1 222.25,34.29 v222.25,24.13 | DIS9.1 270.77,18.79 274.32,15.24 274.32,8.89 273.05,7.62 266.7,7.62 265.43,8.89 R17.3 | DIS9.5 259.33,17.53 R17.3 | X9.5 222.25,11.43 | 222.25,11.43 228.6,11.43 | 228.6,11.43 R17.3 | DIS9.16 231.39,14.22 228.6,11.43 | 222.25,11.43 v222.25,19.05

## Text on the board
Bottom: SV-Corp | SV-Corp | SV-Corp | SV-Corp | SV-Corp | SV-Corp | SV-Corp | SV-Corp | SV-Corp